# Altium PCB PCB1_IGNIS_v4.PcbDoc (part 2 of 2)
Units mil, origin at the board's own origin, x right, y up, seen from the top; angles counter-clockwise.
Board outline 2952.76 x 1771.65 mil, 4 copper layers (Top Layer, GND, Voltages, Bottom Layer), stack 23.756 mil thick; 108 components, 72 nets, 407 pads, 114 vias.
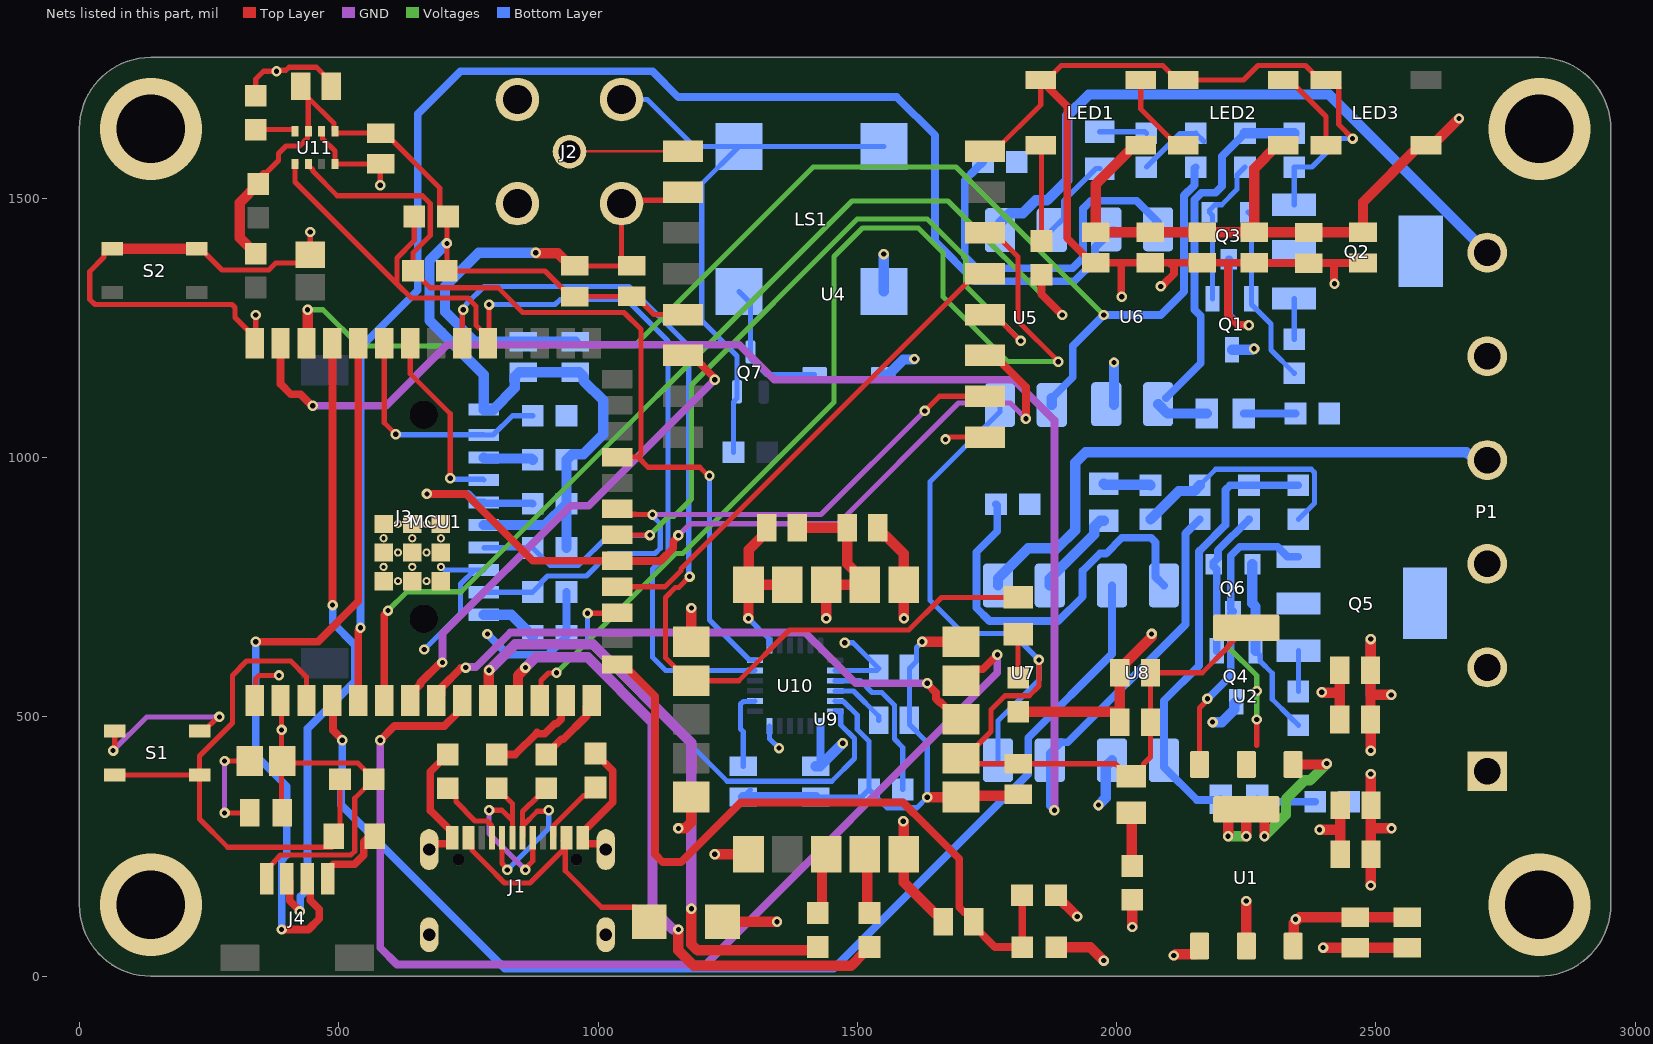
[diagram p4: the nets of this part, all layers, seen from the top]

## Via types
v1: diameter 20, hole 10, Top Layer to Bottom Layer, tented both sides, 110 vias
v2: diameter 196.85, hole 131.89, Top Layer to Bottom Layer, 4 vias

## Nets (pads, with @x,y where several pads share a name; then routed paths per layer and width w, separated by ;. In a path a pad name is that pad's centre, name@x,y a point inside that pad or via, vN(x,y) a via of type N, cw(c..) or ccw(c..) an arc to the next point about the centre after c; other vN are vias at no path point) (continued)
DAT1: J3.P8 R26.2 | length 111.1
  Bottom Layer w20: J3.P8@780,696.85 833.02,696.85 847.16,682.71 R26.2@874.04,655.83
DAT2: J3.P1 R23.2 | length 95.8
  Bottom Layer w20: J3.P1@780,1000 781.81,998.19 871.68,998.19 R23.2@874.04,995.83
DN: J1.A7 J1.B7 R4.2 | length 391
  Top Layer w10: J1.B7@815.2,267.01 815.1,266.91 815.1,217.61 825,207.71 v1(825,205) ; J1.A7@854.57,267.01 855.47,267.91 855.47,290.72 882.84,318.09 903.09,318.09 v1(905,320) ; 854.57,290.72 854.57,317.85 868.98,332.27 869.95,332.27 R4.2@900,362.35
  Bottom Layer w10: v1(825,205) 905,285 v1(905,320)
DP: J1.A6 J1.B6 R3.2 | length 372.7
  Top Layer w10: v1(790,320) 815,320 834.88,300.12 ; R3.2@805,362.35 834.88,332.43 834.88,300.12 ; J1.A6@834.88,267.01 834.88,300.12 ; v1(860,205) 860,207.71 874.25,221.96 J1.B6@874.25,267.01
  GND w10: v1(790,320) 790,275 v1(860,205)
EMATCH_CH1_B: P1.4 Q5.2 Q5.4 U7.1 | length 1139.6
  Bottom Layer w20: U7.1@1771.15,753.51 1771.15,766.7 1829.45,825 1885,825 1920,860 1920,990 1940,1010 2674.47,1010 2678.33,1006.14 2703.7,1006.14 P1.4@2714.57,995.28
EMATCH_CH2_N: P1.6 Q2.2 Q2.4 U5.1 | length 1254.3
  Bottom Layer w20: U5.1@1775,1438.5 1775,1451.69 1794.13,1470.83 1818.92,1470.83 1843.92,1495.83 1865.83,1495.83 1905,1535 1905,1658.77 1946.23,1700 2409.84,1700 P1.6@2714.57,1395.28
GND: C1.2 C2.2 C3.2 C4.2 C5.2 C6.2 C7.2 C8.2 C9.2 C10.2 C11.2 C12.2 C13.1 C14.2 C15.2 C17.1 C19.2 C20.2 C21.2 C22.2 C23.2 C24.2 C25.2 C26.2 C27.1 C28.2 C29.2 C30.2 C31.2 C32.2 C33.2 C34.2 J1.A1_B12 J1.B1_A12 J1.S1 J1.S2 J1.S3 J1.S4 J2.2_1 J2.2_2 J2.2_3 J2.2_4 J3.P6 J4.4 LED1.3 LED2.3 LED3.3 LS1.3 LS1.4 MCU1.41_10 MCU1.41_11 MCU1.41_12 MCU1.41_13 MCU1.41_14 MCU1.41_15 MCU1.41_16 MCU1.41_17 MCU1.41_18 MCU1.41_19 MCU1.41_20 MCU1.41_21 MCU1.GND P1.2 Q2.3 Q3.3 Q5.3 Q6.3 Q7.2 R1.2 R2.2 R5.2 R13.1 R14.2 R15.2 R18.1 R19.2 R20.2 R22.1 R28.1 R30.2 R31.2 R32.2 R35.1 R37.2 R38.2 R39.2 R40.2 S1.3 S1.4 S2.3 S2.4 U1.1 U2.1 U4.1 U4.8 U4.10 U9.1 U9.4 U9.5 U9.6 U9.10 U9.11 U9.15 U9.16 U9.20 U10.1 U10.11 U10.18 U11.1 U11.7 | length 12510.8
  Top Layer w10: S2.4@63.31,1402.32 55.43,1402.32 47.64,1394.53 47.64,1386.65 20,1359.02 20,1305 30.12,1294.88 251.5,1294.88 251.62,1295 294.14,1295 300,1289.14 300,1270.2 337.91,1232.28 MCU1.GND@337.91,1220.47 340,1222.56 v1(340,1275) ; v1(65,435) 65,437.71 68.31,441.01 S1.4@68.31,472.32 ; S2.3@226.69,1402.32 234.57,1402.32 275.18,1361.71 365.05,1361.71 378.69,1375.35 431.3,1375.35 445,1389.06 C13.1@445,1391.5 v1(445,1435) ; S1.3@231.69,472.32 239.57,472.32 267.24,500 v1(270,500) ; v1(280,315) C12.2@328.5,315 C12.2@330.47,315 ; v1(280,415) C11.2@328.5,415 C11.2@330.47,415 ; MCU1.GND@337.91,531.5 340,533.58 340,573.47 346.53,580 v1(385,580) ; R35.1@340,1697.65 340,1730 355,1745 v1(380,1745) 381.91,1746.91 398.23,1746.91 404.09,1752.78 457.29,1752.78 485.99,1724.07 C33.2@485.99,1716.2 ; U11.7@467.06,1629.19 468.95,1627.3 468.95,1614.74 492.65,1591.04 U11.1@492.65,1566.2 C34.2@580.99,1566.2 ; v1(580,1525) 580,1565.21 C34.2@580.99,1566.2 ; C34.2@581.47,1566.67 C34.2@580.99,1566.2 ; C15.2@955,1369.53 1064.53,1369.53 C14.2@1065,1370 1059.09,1370 1045.39,1383.7 J2.2_1@1045.39,1489.61 1051.97,1496.18 1147.99,1496.18 U4.10@1163.66,1511.85 ; v1(1670,1035) 1672.71,1035 1677.12,1039.41 U4.1@1746.34,1039.41 ; U4.8@1746.34,1590.59 1764.06,1590.59 1853.54,1680.08 LED1.3@1853.54,1727.99 1865.35,1727.99 1893.07,1755.71 2089.02,1755.71 2116.73,1727.99 LED2.3@2128.54,1727.99 2244.69,1727.99 2272.4,1755.71 2364.02,1755.71 2391.73,1727.99 LED3.3@2403.54,1727.99 2415.35,1727.99 2428.07,1715.28 2428.07,1641.93 v1(2455,1615) ; U2.1@2159.84,408.31 2159.84,517.14 2175,532.29 v1(2175,535)
  Top Layer w15: J4.4@479.06,188.12 479.06,205.62 489.36,215.93 530.56,215.93 548.33,233.69 548.33,258.8 C10.2@559.53,270 ; J1.S1@674.45,244.17 674.45,246.15 683.89,255.59 714.43,255.59 718.74,259.9 J1.A1_B12@718.74,267.01 718.74,277.64 676.59,319.79 676.59,394.21 R1.2@710,427.62 ; J1.B1_A12@970.71,259.9 975.02,255.59 1005.56,255.59 1015,246.15 J1.S2@1015,244.17 ; J1.B1_A12@970.71,267.01 970.71,277.64 1028.41,335.34 1028.41,395.93 R2.2@995,429.34 ; LED1.3@1853.54,1727.99 1904.61,1676.93 1904.61,1422.99 1952.13,1375.47 C21.2@1960,1375.47 2009.04,1375.47 ; v1(2010,1310) 2009.04,1310.96 2009.04,1375.47 ; v1(2085,1330) 2086.35,1330 2100.01,1343.65 2100.21,1343.65 2110.81,1354.26 2110.81,1366.69 2102.03,1375.47 ; v1(2255,1255) 2254.04,1255.96 2234.04,1255.96 2214.53,1275.47 2214.53,1375.47 ; C26.2@2289.53,1375.24 2369.76,1375.24 C23.2@2370,1375 2419.04,1375 2419.04,1335.96 v1(2420,1335) ; C26.2@2289.53,1375.47 C26.2@2265,1375.47 2214.53,1375.47 ; 2419.04,1375.06 2474.94,1375.06 C22.2@2475,1375.12 ; 2009.04,1375.47 C24.2@2065,1375.47 2102.03,1375.47 ; 2102.03,1375.47 C25.2@2165,1375.47 2214.53,1375.47
  Top Layer w20: S2.4@63.31,1402.32 S2.3@226.69,1402.32 ; v1(880,1395) 880.85,1394.15 922.5,1394.15 947.13,1369.53 C15.2@955,1369.53 ; v1(1155,285) 1168.28,285 1180,296.72 1180,345.24 U9.10@1180.16,345.39 ; v1(1180,710) U9.6@1180,644.76 U9.6@1180.16,644.61 ; v1(1225,235) 1290.24,235 U9.11@1290.39,235.16 ; v1(1290,690) 1290.2,690.2 1290.2,754.65 U9.5@1290.39,754.84 ; C31.2@1325.47,865 1325.47,857.13 1290.39,822.05 U9.5@1290.39,754.84 ; U9.4@1365.2,754.84 U9.5@1290.39,754.84 ; C30.2@1539.53,865 1539.53,857.13 1548.23,848.43 1556.1,848.43 1589.61,814.92 1589.61,754.84 1589.8,754.65 1589.8,690.2 v1(1590,690) ; v1(1588.64,298.96) 1589.61,298 1589.61,180.87 1648.9,121.57 1656.77,121.57 1665.47,112.87 C9.2@1665.47,105 ; v1(1625,645) 1625.2,644.8 1699.65,644.8 U9.20@1699.68,644.76 U9.20@1699.84,644.61 ; v1(1635,345) 1635.2,345.2 1699.65,345.2 1702.38,347.93 1807.46,347.93 C32.2@1810,350.47 ; R32.2@1810,510 1994.17,510 C7.2@2006.3,497.87 ; R5.2@1883.3,56.15 1948.85,56.15 v1(1975,30) ; C7.2@2006.3,490 C7.2@2006.3,497.87 ; v1(2030,95) R31.2@2030,147.35 ; v1(2067.5,660) 2067.5,654.07 2006.3,592.87 C8.2@2006.3,585 C7.2@2006.3,497.87 ; v1(2110,40) 2111.35,40 2113.87,42.52 2151.54,42.52 2159.84,50.83 U1.1@2159.84,58.31 ; v1(2398.04,55.09) 2398.49,54.65 C1.2@2460,54.65 C2.2@2560,54.65 ; v1(2490,175) 2490.18,175.18 2490.18,234.82 C4.2@2490.35,235 2490.18,235.18 2490.18,284.82 ; v1(2490,390) 2490.18,389.82 2490.18,330.18 C3.2@2490.35,330 2490.18,329.82 2490.18,285.18 2490,285 2490.18,284.82 ; v1(2490,435) 2489.76,435.24 2489.76,494.76 C5.2@2489.53,495 2489.53,542.5 ; v1(2490,650) 2489.76,649.76 2489.76,590.24 C6.2@2489.53,590 2489.53,542.5 ; v1(2529.53,542.5) 2489.53,542.5 ; v1(2530,285) 2490.35,285 2490.18,284.82
  GND w10: v1(65,435) 130,500 v1(270,500) ; v1(280,315) v1(280,415)
  GND w20: 2489.53,542.5 2489.53,649.53 v1(2490,650)
  Bottom Layer w10: v1(665,630) 735,700 735,756.18 J3.P6@762.28,783.46 ; MCU1.41_20@696.97,789.37 698.52,789.37 704.43,783.46 J3.P6@762.28,783.46 ; J3.P6@780,783.46 J3.P6@762.28,783.46 ; J2.2_4@1045.39,1690.39 1094.86,1690.39 1185.49,1599.76 LS1.4@1271.75,1599.76 ; R30.2@1261.21,1010 1261.21,1107.35 1268.27,1114.41 Q7.2@1268.27,1127.2 1268.27,1195.79 1200,1264.06 1200,1528.02 LS1.4@1271.75,1599.76 ; C17.1@1280,345.47 C17.1@1293.7,359.17 ; v1(1290,690) 1330.28,649.72 1330.28,638.07 U10.1@1330.79,637.56 ; U10.18@1330.79,482.44 1330.79,457.98 v1(1349.04,439.73) ; C29.2@1420,345.47 1507.82,345.47 R22.1@1522.35,360 1522.35,452.96 1499.8,475.51 1499.8,503.75 1473.59,529.96 1458.07,529.96 U10.11@1457.56,530.47 ; R22.1@1522.38,360 1557.38,325 1615,325 v1(1635,345) 1635,450.91 1600.35,485.55 C27.1@1600.35,493.43 C28.2@1600.35,593.43 1614.06,607.13 1614.06,634.06 v1(1625,645) ; LS1.3@1551.28,1599.76 LS1.4@1271.75,1599.76 ; R15.2@2057.35,1559.99 2088.29,1590.93 ; 2088.27,1590.95 2122.3,1624.97 2152.02,1624.97 R14.2@2152.35,1625.3 ; R14.2@2152.35,1625.3 R14.2@2168.26,1609.36 ; R19.2@2160.34,946.48 2191.25,977.39 2375.39,977.39 2381.25,971.53 2381.25,912.08 R18.1@2350.34,881.17 ; Q2.3@2342.35,1487.65 R13.1@2342.35,1559.99 2376.74,1559.99 2431.75,1615 v1(2455,1615)
  Bottom Layer w15: v1(2175,535) 2175.58,535 2220.18,579.6 2220.18,699.26 Q6.3@2224.4,703.48 2220.18,707.7 2220.18,810.42 2237.69,827.94 2310.2,827.94 2329.34,808.8 Q5.3@2350.34,808.8 ; Q3.3@2216.41,1382.33 2216.41,1274.95 2235.4,1255.96 2254.04,1255.96 v1(2255,1255)
  Bottom Layer w20: v1(880,1395) 770,1395 705,1330 705,1281.11 762.41,1223.7 C20.2@855.96,1223.7 856.2,1223.46 955.72,1223.46 C19.2@955.96,1223.23 ; C17.1@1280,345.47 C29.2@1420,345.47 ; R20.2@2065.34,881.17 2119.68,935.51 2149.43,935.51 R19.2@2160.34,946.45
  other v2: 137.8,137.8 2814.96,137.8 137.8,1633.86 2814.96,1633.86
GPS_UART_RX: MCU1.11 R34.2 | length 1240.4
  Top Layer w20: MCU1.11@837.91,531.5 845.63,539.21 845.63,579.28 860,593.65 v1(860,595) ; v1(1155,90) 1155,50 1184.61,20.39 1487.83,20.39 1512.83,45.39 R34.2@1523.77,56.3
  GND w20: v1(860,595) 880,615 980,615 1105,490 1105,129.64 1144.64,90 v1(1155,90)
GPS_UART_TX: MCU1.10 R33.2 | length 1188.4
  Top Layer w20: MCU1.10@787.91,531.5 789.04,532.63 789.04,589.04 v1(790,590) ; v1(1180,130) 1180,61.72 1191.72,50 1417.12,50 R33.2@1423.61,56.48
  GND w20: v1(790,590) 840,640 990.36,640 1180,450.36 v1(1180,130)
INT_GPS: MCU1.8 U9.18 | length 1151.9
  Top Layer w15: MCU1.8@687.91,531.5 698.13,541.71 698.13,556.63 735.54,594.04 744.04,594.04 v1(745,595) ; v1(1635,565) 1635,563.65 1651.75,546.9 1651.75,535.26 1659.22,527.79 1661.15,527.79 1693.94,495 U9.18@1699.84,495
  GND w15: v1(745,595) 745.96,595.96 764.14,595.96 830.68,662.5 1399.51,662.5 1497.01,565 v1(1635,565)
MPU6050_INT: MCU1.17 U10.12 | length 868.9
  Top Layer w10: v1(980,700) 1036.14,700 MCU1.17@1037.13,700.98
  Bottom Layer w10: v1(980,700) 980,645.11 1249.28,375.83 1450.72,375.83 1494.43,419.54 1494.43,458.34 1468.11,484.66 1468.11,510.28 1467.6,510.79 U10.12@1457.56,510.79
NetC17_2: C17.2 U10.20 | length 152
  Bottom Layer w10: C17.2@1280,404.53 1280,471.61 1275,476.61 1275,524.61 1280.35,529.96 1301.93,529.96 U10.20@1302.44,530.47
NetC27_2: C27.2 U10.10 | length 111.9
  Bottom Layer w10: U10.10@1457.56,550.16 1492.44,550.16 1541.3,501.3 C27.2@1541.3,493.43
NetD2_A: D2.A U5.2 | length 161
  Bottom Layer w10: U5.2@1875,1438.5 1897.72,1461.23 1897.72,1494.48 1960.46,1557.21 D2.A@1967.35,1557.21
NetD2_C: D2.C R15.1 | length 91.2
  Bottom Layer w10: D2.C@1967.35,1628.08 2054.57,1628.08 R15.1@2057.35,1625.3
NetD3_A: D3.A U7.2 | length 172
  Bottom Layer w20: U7.2@1871.15,753.51 1871.15,766.7 1956.8,852.35 1956.8,866.71 1968.45,878.36 D3.A@1975.34,878.36
NetD3_C: D3.C R20.1 | length 91.2
  Bottom Layer w20: D3.C@1975.34,949.23 1976.73,947.84 2063.95,947.84 R20.1@2065.34,946.45
NetD4_C: D4.C R31.1 | length 103
  Top Layer w20: D4.C@2028.31,314.92 2029.15,314.07 2029.15,213.5 R31.1@2030,212.65
NetD5_A: D5.A LS1.2 Q7.3 | length 275.2
  Bottom Layer w10: LS1.2@1271.75,1320.24 1293.86,1298.13 Q7.3@1293.86,1203.58 1293.86,1190.79 1324.65,1160 D5.A@1417.72,1160
NetD6_C: D6.C R32.1 | length 84.3
  Top Layer w10: R32.1@1810,575.31 D6.C@1810,659.57
NetD7_A: D7.A R11.1 R13.2 U6.3 | length 796.1
  Bottom Layer w15: U6.3@2095,1114.69 2162.06,1181.75 2162.06,1272.87 2150,1284.93 2150,1496.99 2163.5,1510.5 2190.5,1510.5 2203.26,1523.25 2203.26,1581.18 R11.1@2247.35,1625.3
  Bottom Layer w20: U6.3@2080,1102.99 2097.99,1085 D7.A@2174.13,1085 ; R11.1@2247.35,1625.3 R13.2@2342.35,1625.3
NetD7_C: D7.C R37.1 | length 99.7
  Bottom Layer w15: D7.C@2245,1085 R37.1@2344.69,1085
NetD8_A: D8.A R16.1 R18.2 U8.3 | length 863.5
  Bottom Layer w15: D8.A@2200.34,341.24 2199.1,340 2154.46,340 2091.15,403.31 U8.3@2091.15,416.5 2091.15,531.24 2158.74,598.83 2158.74,818.89 2166.07,826.22 2210,870.15 2210,937.66 2218.79,946.45 R16.1@2255.34,946.45 R18.2@2350.34,946.45
NetD8_C: D8.C R39.1 | length 113.6
  Bottom Layer w15: D8.C@2271.21,341.24 2276.21,336.24 R39.1@2382.69,336.24
NetJ1_A5: J1.A5 R1.1 | length 144.1
  Top Layer w10: R1.1@710,362.35 725.91,346.44 725.91,336.61 763.07,299.45 785.87,299.45 794.61,290.72 794.61,267.91 J1.A5@795.51,267.01
NetJ1_B5: J1.B5 R2.1 | length 135
  Top Layer w10: J1.B5@913.62,267.01 914.53,267.91 914.53,290.72 971.93,348.12 979.09,348.12 R2.1@995,364.03
NetJ2_1: J2.1 U4.9 | length 218.9
  Top Layer w4.58: J2.1@945.3,1590.3 U4.9@1163.37,1590.3
  Top Layer w20: J2.1@945,1590 J2.1@945.3,1590.3 ; U4.9@1163.37,1590.3 U4.9@1163.66,1590.59
NetLED1_2: LED1.2 LED2.4 | length 166.9
  Top Layer w10: LED1.2@2046.46,1727.99 2046.46,1672.28 2116.73,1602.01 LED2.4@2128.54,1602.01
NetLED1_4: LED1.4 R29.2 | length 184.4
  Top Layer w10: R29.2@1855,1417.65 LED1.4@1855,1602.01
NetLED2_2: LED2.2 LED3.4 | length 166.9
  Top Layer w10: LED2.2@2321.46,1727.99 2333.27,1727.99 2403.54,1657.72 LED3.4@2403.54,1602.01
NetQ1_1: Q1.1 Q3.1 R11.2 | length 288.3
  Bottom Layer w10: Q3.1@2179,1472.88 2184.95,1466.93 Q1.1@2184.95,1306.05 ; Q3.1@2179,1476.82 2189.75,1487.57 2202.57,1487.57 2232.2,1517.2 2232.2,1544.84 R11.2@2247.35,1559.99
NetQ1_2: Q1.2 Q3.2 R12.1 | length 346.9
  Bottom Layer w10: Q3.2@2253.81,1472.88 2259.75,1466.94 Q1.2@2259.75,1306.05 2259.75,1295.22 2297.49,1257.48 2297.49,1207.54 R12.1@2342.35,1162.68
NetQ2_1: Q2.1 R12.2 | length 78.7
  Bottom Layer w10: R12.2@2342.35,1227.95 Q2.1@2342.35,1306.65
NetQ4_1: Q4.1 Q6.1 R16.2 | length 280.8
  Bottom Layer w15: Q6.1@2186.99,794.03 2186.99,790.09 2192.94,784.14 Q4.1@2192.94,627.2 ; Q6.1@2186.99,797.97 2195.24,806.22 2195.24,821.01 R16.2@2255.34,881.14
NetQ4_2: Q4.2 Q6.2 R17.1 | length 346.9
  Bottom Layer w10: Q4.2@2267.74,627.2 2276.52,618.42 2276.52,607.59 2300,584.11 2300,534.14 R17.1@2334.4,499.74 ; R17.1@2334.43,499.74 R17.1@2350.34,483.8
  Bottom Layer w20: Q6.2@2261.8,794.03 2261.8,718.92 2267.74,712.98 Q4.2@2267.74,627.2
NetQ5_1: Q5.1 R17.2 | length 78.7
  Bottom Layer w10: R17.2@2350.34,549.1 Q5.1@2350.34,627.8
NetR22_2: R22.2 U10.9 | length 302.8
  Bottom Layer w10: U10.9@1457.56,569.84 1505.46,569.84 1528.31,546.99 1547.15,546.99 1571.65,522.49 1571.65,457.2 1587.65,441.2 R22.2@1587.65,360
NetR33_1: R33.1 U9.13 | length 120.2
  Top Layer w20: R33.1@1423.77,121.63 1431.88,129.75 1431.88,227.04 U9.13@1440,235.16
NetR34_1: R34.1 U9.14 | length 117.2
  Top Layer w20: U9.14@1514.8,235.16 1519.28,230.68 1519.28,126.11 R34.1@1523.77,121.63
NetR38_1: R38.1 U6.2 | length 719
  Bottom Layer w15: R38.1@1728.91,1556.56 1707.26,1534.91 1707.26,1387.74 1730,1365 1915,1365 1935,1385 1935,1480 1950,1495 2038.19,1495 2080,1453.19 U6.2@2080,1440 ; R38.1@1728.91,1556.59 R38.1@1742.35,1570
NetR40_1: R40.1 U8.2 | length 762.4
  Bottom Layer w15: R40.1@1767.35,910 1770,907.35 1770,858.02 1729.52,817.54 1729.52,710.27 1754.79,685 1887.51,685 1934.42,731.91 1934.42,781.65 1967.65,814.88 1979.73,814.88 2010.13,845.28 2066.21,845.28 2075,836.49 2075,769.66 U8.2@2091.15,753.51
PPS_GPS: D6.A MCU1.32 U9.7 | length 1959.2
  Top Layer w10: MCU1.32@737.91,1220.47 738.16,1220.72 738.16,1283.16 v1(740,1285) ; v1(1176.6,770.57) 1155.62,749.58 1149.07,749.58 1130,730.5 1130,614.06 1174.25,569.8 1180.16,569.8 1271.33,569.8 1369.03,667.5 1599.32,667.5 1662.25,730.43 D6.A@1810,730.43
  Bottom Layer w10: v1(740,1285) 740,1289.06 746.95,1296 746.95,1296.95 780,1330 1060,1330 1175,1215 1175,772.17 v1(1176.6,770.57)
PYRO_CH1_CONT: MCU1.39 R19.1 U7.3 | length 3140.9
  Top Layer w15: MCU1.39@387.91,1220.47 387.91,1142.09 407.83,1122.17 426.48,1122.17 448.65,1100 v1(450,1100)
  GND w15: v1(450,1100) 591.47,1100 708.97,1217.5 1272.5,1217.5 1340,1150 1801.82,1150 1880,1071.82 v1(1880,320)
  Bottom Layer w15: v1(1880,320) 1871.15,328.85 U7.3@1871.15,416.5 1871.15,429.37 1892.78,451 1905.65,451 2132.78,678.13 2132.78,853.55 R19.1@2160.34,881.14
PYRO_CH1_GATE: MCU1.4 U8.1 | length 2251.4
  Top Layer w15: MCU1.4@487.91,531.5 489.04,530.37 489.04,474.35 507.04,456.35 v1(507.04,455)
  Bottom Layer w15: v1(507.04,455) 507.04,393.3 504.54,390.8 504.54,330.46 820,15 1454.52,15 1829.52,390 1829.52,459.73 1991.15,621.37 U8.1@1991.15,753.51
PYRO_CH2_CONT: MCU1.38 R14.1 U5.3 | length 2528.2
  Top Layer w20: MCU1.38@437.91,1220.47 440,1222.56 v1(440,1285)
  Voltages w10: v1(440,1285) 470,1285 540,1215 1070,1215 1415,1560 1690,1560 v1(1975,1275)
  Bottom Layer w15: U5.3@1875,1114.69 1915.18,1154.86 1915.18,1215.18 v1(1975,1275) 2085,1275 2130,1320 2130,1505.28 2150.06,1525.34 2150.06,1557.71 R14.1@2152.35,1559.99
  Bottom Layer w20: U5.3@1875,1101.5 U5.3@1875,1114.69
PYRO_CH2_GATE: MCU1.5 U6.1 | length 2898.4
  Top Layer w15: MCU1.5@537.91,531.5 537.91,666.35 541.99,670.42 v1(541.99,671.77)
  Bottom Layer w15: v1(541.99,671.77) 541.79,671.97 541.79,1211.79 652.5,1322.5 652.5,1662.5 735,1745 1105,1745 1155,1695 1576.21,1695 1650,1621.21 1650,1416.72 1726.72,1340 1918.28,1340 1958.37,1380.08 1958.37,1405.18 1991.69,1438.5 U6.1@1995,1438.5
RESET: C10.1 MCU1.3 R7.2 S1.1 S1.2 | length 1094.1
  Top Layer w10: S1.2@68.31,387.68 S1.1@231.69,387.68 ; MCU1.3@437.91,531.5 437.91,577.09 407.5,607.5 322.5,607.5 295,580 295,488.02 231.69,424.72 S1.1@231.69,387.68 ; R7.2@502.35,380 502.35,271.87 500.47,270 500.47,262.48 486.77,248.78 286.22,248.78 231.69,303.31 S1.1@231.69,387.68
RESET_GPS: MCU1.9 U9.19 | length 2160.7
  Top Layer w15: v1(580,455) 607.46,482.46 703.8,482.46 727.7,506.36 727.7,521.28 MCU1.9@737.91,531.5 ; U9.19@1699.84,569.8 1721.87,591.83 1741.83,591.83 v1(1770,620)
  GND w15: v1(580,455) 580,55 612.5,22.5 1207.5,22.5 1770,585 v1(1770,620)
RFM95W_CS: MCU1.18 U4.5 | length 961.5
  Top Layer w10: MCU1.18@1037.13,750.98 1129.27,750.98 1160,781.72 1160,785.75 1728.62,1354.37 U4.5@1746.34,1354.37
RFM95W_INT: MCU1.7 U4.14 | length 966.9
  Top Layer w15: MCU1.7@637.91,531.5 637.91,543.31 657.7,563.09 657.7,566.2 695.54,604.04 699.04,604.04 v1(700,605) ; U4.14@1163.66,1196.89 1181.38,1196.89 1224.04,1154.22 1224.04,1150.96 v1(1225,1150)
  GND w15: v1(700,605) 700,660 947.02,907.02 982.02,907.02 v1(1225,1150)
RFM95W_RESET: MCU1.12 U4.6 | length 2036.4
  Top Layer w10: MCU1.12@887.91,531.5 890.17,533.75 890.17,570.17 904.82,584.82 919.82,584.82 v1(920,585) ; U4.6@1746.34,1433.11 1764.06,1433.11 1810,1387.17 1810,1262.98 1887.38,1185.61 v1(1887.38,1184.71)
  Voltages w10: v1(920,585) 1150,815 1163.28,815 1455,1106.72 1455,1387.5 1510,1442.5 1617.5,1442.5 1665,1395 1665,1310 1790,1185 1887.09,1185 v1(1887.38,1184.71)
RXD0: J4.3 MCU1.36 | length 1478.3
  Top Layer w15: v1(340,645) 460,645 537.91,722.91 MCU1.36@537.91,1220.47 ; v1(390,90) 441.82,90 462.5,110.68 462.5,129.32 445.19,146.63 445.19,182.62 J4.3@439.69,188.12
  Bottom Layer w15: v1@340,643.65 340,426.38 400,366.38 400,233.86 390,223.86 v1(390,90)
SD_CS: J3.P2 MCU1.34 | length 358.8
  Top Layer w10: MCU1.34@637.91,1220.47 637.91,1161.74 715,1084.65 v1(715,960)
  Bottom Layer w10: v1(715,960) 716.65,958.35 778.35,958.35 J3.P2@780,956.69
SD_DETECT: J3.WP MCU1.35 R28.2 | length 464.9
  Top Layer w10: MCU1.35@587.91,1220.47 587.91,1067.09 v1(610,1045)
  Bottom Layer w10: v1(610,1045) 610.85,1044.15 779.15,1044.15 J3.WP@780,1043.31 797.72,1043.31 835.24,1080.83 R28.2@874.04,1080.83
SDO: R35.2 U11.5 | length 77.9
  Top Layer w10: R35.2@340,1632.35 413.98,1632.35 415.87,1630.46 U11.5@415.87,1629.19
SNS_I2C_SCL: MCU1.31 R10.2 U10.23 U11.4 | length 1986.8
  Top Layer w10: U11.4@417.76,1568.09 U11.4@415.87,1566.2 415.87,1531.42 612.35,1334.95 ; R10.2@645.63,1465 645.6,1418.31 612.35,1385.05 612.35,1334.95 ; MCU1.31@787.91,1220.47 MCU1.31@787.91,1232.28 ; v1(790,1295) 790,1234.37 MCU1.31@787.91,1232.28 ; 612.35,1334.95 639.8,1307.5 749.32,1307.5 765,1291.82 765,1255.2 MCU1.31@787.91,1232.28
  Bottom Layer w10: v1(790,1295) 917.03,1295 927.03,1305 1055,1305 1135,1225 1135,843.28 1135,815 1105,785 1105,615 1130.47,589.53 U10.23@1302.44,589.53
SNS_I2C_SDA: MCU1.23 R21.2 U10.24 U11.3 | length 1739.1
  Top Layer w10: U11.3@441.47,1566.2 441.47,1563.25 450.17,1554.55 450.17,1552.22 497.38,1505 661.62,1505 676.57,1490.05 676.57,1428.06 643.29,1394.78 R21.2@643.29,1360 675.82,1327.5 807.5,1327.5 855,1280 1050,1280 1082.71,1247.29 1082.71,1006.84 1076.85,1000.98 ; MCU1.23@1037.13,1000.98 1076.85,1000.98 ; v1(1215,965) 1212.54,965 1196.09,981.45 1096.39,981.45 1076.85,1000.98
  Bottom Layer w10: v1(1215,965) 1215,686.61 1291.89,609.72 1301.93,609.72 U10.24@1302.44,609.21
SNS_SPI_MISO: J3.P7 MCU1.21 R24.2 U4.2 | length 1255.6
  Top Layer w10: MCU1.21@1037.13,900.98 1047.34,890.77 1071.73,890.77 1072.5,890 v1(1105,890) ; v1(1630,1090) 1658.15,1118.15 U4.2@1746.34,1118.15
  GND w10: v1(1105,890) 1430,890 v1(1630,1090)
  Bottom Layer w10: J3.P7@780,740.16 780.33,740.49 R24.2@873.71,740.49 ; R24.2@874.07,740.83 889.98,756.73 889.98,759.14 902.57,771.73 977.61,771.73 1020.87,815 1110,815 1120,825 1120,849.5 1120,872.29 1105,887.29 v1(1105,890)
SNS_SPI_MOSI: J3.P3 MCU1.19 R27.2 U4.3 | length 1734.9
  Top Layer w15: v1(670,930) 745,930 874.02,800.98 MCU1.19@1037.13,800.98 1037.62,800.49 1120.49,800.49 1145,825 1145,838.65 1155,848.65 v1(1155,850) ; U4.3@1746.34,1196.89 1764.06,1196.89 1825,1135.94 v1(1825,1075)
  GND w10: v1(1155,850) 1177.5,872.5 1462.5,872.5 1695,1105 1795,1105 v1(1825,1075)
  Bottom Layer w15: v1(670,930) 749.19,930 757.97,921.21 757.97,917.7 762.28,913.39 J3.P3@780,913.39 781.28,912.11 872.76,912.11 R27.2@874.04,910.83
SNS_SPI_SCK: J3.P5 MCU1.20 R25.2 U4.4 | length 1736.9
  Top Layer w10: MCU1.20@1037.63,850.5 v1(1100,850.5) ; U4.4@1746.34,1275.63 1764.06,1275.63 1814.69,1225 v1(1815,1225)
  Top Layer w15: MCU1.20@1037.13,850.98 MCU1.20@1037.62,850.49
  Voltages w10: v1(1100,850.5) 1135.73,886.21 1146.21,886.21 1180,920 1180,1140 1500,1460 1635,1460 1709.04,1385.96 1709.04,1330.96 v1(1815,1225)
  Bottom Layer w10: J3.P5@780,826.77 780.45,826.31 873.55,826.31 R25.2@874.04,825.83 889.98,809.92 907.46,792.43 962.43,792.43 1020,850 1099.5,850 v1(1100,850.5)
TXD0: J4.2 MCU1.37 | length 1231
  Top Layer w15: J4.2@400.31,188.12 405.81,182.62 405.81,145.54 425,126.35 v1(425,125) ; MCU1.37@487.91,1220.47 488.14,1220.25 488.14,715.7 v1(488.36,715.47)
  Bottom Layer w15: v1(425,125) 425.96,125.96 425.96,153.46 440,167.5 440,477.36 531.48,568.84 531.48,638.25 488.36,681.36 v1(488.36,715.47)
USB2_N: MCU1.13 R3.1 | length 206
  Top Layer w15: R3.1@805,427.65 840.48,427.65 882.55,469.73 884.87,467.41 897.3,467.41 916.64,486.75 920.41,486.75 929.2,495.54 929.2,509.47 941.23,521.5 947.91,521.5 MCU1.13@937.91,531.5
USB2_P: MCU1.14 R4.1 | length 142.5
  Top Layer w15: R4.1@900,427.65 929.07,456.75 932.84,456.75 977.91,501.83 977.91,521.5 MCU1.14@987.91,531.5
VBAT: C1.1 C2.1 P1.1 P1.3 P1.5 Q1.3 Q4.3 R6.2 U1.3 U6.4 U8.4 | length 616.1
  Top Layer w20: R6.2@1883,156.15 v1(1924.04,115.13) ; U1.3@2340.16,58.31 2341.39,59.54 2341.39,101.98 2353.11,113.7 C2.1@2560,113.7
  Bottom Layer w20: v1(1965,330) 1979.18,344.18 1979.18,404.53 U8.4@1991.15,416.5 ; U6.4@1995,1101.5 v1(1994.98,1183.24) ; v1(2185,490) 2202.37,490 2226.56,514.19 2226.56,525.02 Q4.3@2230.34,528.8 ; Q1.3@2222.35,1207.65 2261.29,1207.65 2263.65,1210 v1(2265,1210)
  other v1: 2345,110
VBAT_MON: C9.1 MCU1.15 R5.1 R6.1 | length 1444.5
  Top Layer w15: MCU1.15@1037.13,600.98 1048.94,600.98 1110,539.92 1110,235 1125,220 1160,220 1275,335 1587.96,335 1631.63,291.33 1696.67,226.29 1696.67,132.86 1705.46,124.07 1713.33,124.07 1724.53,112.87 1724.53,97.13 1765.5,56.15 R5.1@1818,56.15 1817.84,56.3 1817.84,156 R6.1@1817.69,156.15
VBUS: D1.2 J1.A4_B9 J1.B4_A9 | length 532
  Top Layer w10: J1.A4_B9@750.24,267.01 757.05,260.2 757.05,242.95 785,215 820,180 869.1,180 932.4,243.3 ; J1.B4_A9@932.4,260.2 J1.B4_A9@939.21,267.01 936.69,264.49 936.69,260.2 936.69,243.3 936.69,203.31 1006.93,133.07 1070.98,133.07 D1.2@1099.06,105
VCC_3V3: C7.1 C8.1 C11.1 C12.1 C14.1 C15.1 C19.1 C20.1 C21.1 C22.1 C23.1 C24.1 C25.1 C26.1 C28.1 C29.1 C30.1 C31.1 C32.1 C33.1 C34.1 D4.A J3.CD J3.P4 J4.1 LED1.1 LED2.1 LED3.1 MCU1.2 R7.1 R8.1 R10.1 R21.1 R23.1 R24.1 R25.1 R26.1 R27.1 R36.1 U2.2 U4.13 U5.4 U7.4 U9.2 U9.3 U9.17 U10.8 U10.13 U11.6 U11.8 | length 7706.3
  Top Layer w10: R36.1@360.91,1543.56 360.91,1549.78 383.98,1572.86 383.98,1586.4 398.63,1601.04 425.07,1601.04 434.58,1610.55 434.58,1610.77 439.58,1615.77 439.58,1627.91 U11.6@440.86,1629.19 ; J4.1@360.94,188.12 360.94,205.62 376.1,220.78 376.1,221.55 387.98,233.43 523.32,233.43 530.83,240.94 530.83,343.2 567.62,380 536.71,410.91 393.62,410.91 C11.1@389.53,415 ; MCU1.2@387.91,531.5 390,529.41 v1(390,475) 390,415.47 C11.1@389.53,415 ; C12.1@389.53,315 C11.1@389.53,415 ; C33.1@426.94,1716.2 426.94,1708.33 C33.1@441.47,1693.8 ; U11.6@441.47,1629.19 C33.1@441.47,1693.8 ; U11.8@492.65,1627.62 494.54,1625.73 C34.1@581.47,1625.73 589.34,1625.73 695,1520.07 695,1476.24 708.59,1462.65 v1@708.59,1411.33 ; U11.8@492.65,1629.19 490.76,1631.08 490.76,1644.51 C33.1@441.47,1693.8 ; v1(708.59,1413.05) v1@708.59,1411.33 ; U4.13@1163.66,1275.63 1108.19,1275.63 1073.35,1310.47 C15.1@955,1310.47 947.13,1310.47 897.6,1360 R21.1@708.59,1360 v1@708.59,1411.33 ; U9.17@1699.84,420.2 1705.75,420.2 1757.61,472.06 1757.61,513.6 1784.95,540.94 1831.62,540.94 1850,559.32 v1(1850,610) ; U9.17@1702.8,417.24 1710.51,409.53 C32.1@1810,409.53 1997.68,409.53 2021.42,385.79 D4.A@2028.31,385.79 2035.2,385.79 2051.85,402.44 2051.85,409.33 2065.35,422.83 C7.1@2065.35,490 C8.1@2065.35,585 2165,585 2215,635 2215,636.69 U2.2@2250,671.69 ; 2270,445 v1(2270,495)
  Top Layer w20: R8.1@340,1392.68 309.09,1423.59 309.09,1491.71 R36.1@345,1527.62 ; R36.1@345,1527.65 355.91,1538.56 R36.1@355.91,1544.18 ; C31.1@1384.53,865 C30.1@1480.47,865 1480.47,795.08 1514.8,760.75 1514.8,754.84 1440,754.84 v1(1440,690) ; LED1.1@2046.46,1602.01 2034.65,1602.01 1960,1527.36 C21.1@1960,1434.53 C24.1@2065,1434.53 C25.1@2165,1434.53 C26.1@2265,1434.53 ; LED2.1@2321.46,1602.01 2309.65,1602.01 2265,1557.36 C26.1@2265,1434.53 ; v1(2660,1653.74) 2608.27,1602.01 LED3.1@2596.46,1602.01 2584.65,1602.01 2475,1492.36 C22.1@2475,1434.17 2474.94,1434.11 2370.06,1434.11 C23.1@2370,1434.06 2369.76,1434.29 2265.24,1434.29 C26.1@2265,1434.53
  Voltages w10: 2215,635 2270,580 v1(2270,495)
  Bottom Layer w10: U10.8@1457.56,589.53 C28.1@1537.4,589.53 ; v1(1475.92,642.81) 1491.91,642.81 C28.1@1541.3,593.43 ; U7.4@1771.15,416.5 1771.15,492.4 1850,571.25 v1(1850,610) 1799.35,660.65 1704.35,660.65 1640,725 1640,953.31 1775,1088.31 U5.4@1775,1101.5
  Bottom Layer w15: v1(786.67,659.84) 826.51,620 846.81,620 846.89,619.92 901.19,619.92 901.27,620 903.52,620 R26.1@939.35,655.83 R24.1@939.35,740.83 ; C29.1@1429.21,413.23 U10.13@1429.21,482.44
  Bottom Layer w20: v1(708.59,1413.05) 675,1379.46 675,1265 780,1160 J3.CD@780,1092.52 797.72,1092.52 839.39,1134.19 839.39,1155.94 848.09,1164.65 C20.1@855.96,1164.65 856.2,1164.41 939.35,1164.41 955.72,1164.41 C19.1@955.96,1164.17 963.83,1164.17 972.53,1155.47 972.53,1147.6 1010,1110.13 1010,1045 971.73,1006.73 950.25,1006.73 R23.1@939.35,995.83 R27.1@939.35,910.83 R25.1@939.35,825.83 ; J3.P4@780,870.08 898.57,870.08 R27.1@939.35,910.83 ; C29.1@1420,404.53 1427.44,404.53 v1(1471.93,449.02)
  other v1: 2270,550
VCC_5V: C3.1 C4.1 C5.1 C6.1 D1.1 D5.C LS1.1 U1.2 U2.3 | length 1103.7
  Top Layer w20: D1.1@1240,105 v1(1345,105) ; v1(2215,270) 2215,305.91 2230.79,321.69 U1.2@2250,321.69 ; U1.2@2250,58.31 v1(2250,145) ; v1(2250,270) 2250,320 2270.91,320 2285,305.91 v1(2285,270) ; U2.3@2340.16,408.31 2348.41,408.31 2348.46,408.25 2401.9,408.25 2403.65,410 v1(2405,410) ; v1(2391.3,282.5) 2431.3,282.5 ; v1(2395.47,547.5) 2396.43,546.54 2425.08,546.54 2429.12,542.5 2430.47,542.5 ; C5.1@2430.47,495 2430.47,542.5 ; C6.1@2430.47,590 2430.47,542.5 ; C4.1@2431.3,235 2431.3,282.5 ; C3.1@2431.3,330 2431.3,282.5
  Voltages w20: v1(2215,270) v1(2250,270) ; v1(2285,270) 2326.51,311.51 2326.51,341.51 2362.88,377.88 2372.88,377.88 v1(2405,410)
  Bottom Layer w20: D5.C@1550,1160 1559.45,1160 1588.49,1189.04 1609.04,1189.04 v1(1610,1190) ; v1(1551.12,1392.33) 1551.28,1392.17 LS1.1@1551.28,1320.24
WS2812B_DATA: MCU1.6 R29.1 | length 1988.7
  Top Layer w15: MCU1.6@587.91,531.5 587.91,696.56 595,703.65 v1(595,705) ; R29.1@1855,1352.35 1855,1315 v1(1895,1275)
  Voltages w10: v1(595,705) 631.44,741.44 736.44,741.44 1490,1495 1675,1495 v1(1895,1275)
pads on no net: J1. J1.A8 J1.B8 J3. J3.G1 J3.G2 J4.5 J4.6 LED3.2 MCU1.16 MCU1.24 MCU1.25 MCU1.26 MCU1.28 MCU1.29 MCU1.30 MCU1.33 U4.7 U4.11 U4.12 U4.15 U4.16 U9.8 U9.9 U9.12 U10.2 U10.3 U10.4 U10.5 U10.6 U10.7 U10.14 U10.15 U10.16 U10.17 U10.19 U10.21 U10.22
copper on no net: | length 15.3
  Bottom Layer w15: 2049.52,739.37 2049.52,754.66

## Polygon pours and split planes (outlines as drawn)
GND on Bottom Layer "GND_L04_P064" (solid, pour order 64): 141.36,0 cw(c141.36,137.8) 3.57,137.8 3.57,1633.86 cw(c141.36,1633.86) 141.36,1771.65 2818.53,1771.65 cw(c2818.53,1633.86) 2956.32,1633.86 2956.32,137.8 cw(c2818.53,137.8) 2818.53,0
EMATCH_CH2_N on Bottom Layer "EMATCH_CH2_N_L04_P059" (solid, pour order 59): 2285,1415 2300,1430 2515,1430 2530,1445 2530,1475 2545,1490 2750,1490 2765,1475 2765,1325 2750,1310 2545,1310 2530,1325 2530,1355 2515,1370 2300,1370 2285,1385
EMATCH_CH1_B on Bottom Layer "EMATCH_CH1_B_L04_P060" (solid, pour order 60): 2305,680 2290,695 2290,745 2305,760 2530,760 2545,775 2545,1050 2560,1065 2560,1070 2825,1070 2840,1055 2840,920 2825,905 2690,905 2675,890 2675,645 2660,630 2540,630 2520,650 2520,665 2505,680
GND on Bottom Layer "GND_L04_P042" (solid, pour order 42): 560,910 725,910 725,735 560,735
GND on Bottom Layer "GND_L04_P055" (solid, pour order 55): 2465,1445 2485,1460 2485,1515 2465,1530 2295,1530 2280,1515 2280,1460 2295,1445
GND on Bottom Layer "GND_L04_P054" (solid, pour order 54): 2285,785 2300,770 2470,770 2490,785 2490,840 2470,855 2300,855 2285,840
VCC_3V3 on Top Layer "VCC_3V3_L01_P058" (solid, pour order 58): 2205,605 2220,590 2220,385 2235,370 2270,370 2285,385 2285,590 2300,605 2330,605 2340,615 2340,695 2325,710 2180,710 2165,695 2165,620 2180,605
GND on Top Layer "GND_L01_P063" (solid, remove dead copper, pour order 63): 137.8,0 cw(c137.8,137.8) 0,137.8 0,1633.86 cw(c137.8,1633.86) 137.8,1771.65 2814.96,1771.65 cw(c2814.96,1633.86) 2952.76,1633.86 2952.76,137.8 cw(c2814.96,137.8) 2814.96,0
GND on Top Layer "GND_L01_P062" (solid, pour order 62): 560,910 725,910 725,735 560,735
VCC_5V on Top Layer "VCC_5V_L01_P050" (solid, pour order 50): 2165,350 2180,365 2325,365 2340,350 2340,255 2330,245 2180,245 2165,260
VCC_3V3 on Voltages "VCC_3V3_L03_P056" (solid, pour order 56): 137.8,0 cw(c137.8,137.8) 0,137.8 0,1633.86 cw(c137.8,1633.86) 137.8,1771.65 2814.96,1771.65 cw(c2814.96,1633.86) 2952.76,1633.86 2952.76,137.8 cw(c2814.96,137.8) 2814.96,0
VBAT on Voltages "VBAT_L03_P048" (solid, pour order 48): 1850,130 1850,265 1945,360 1945,465 1975,495 2165,495 2180,510 2180,565 2195,580 2270,580 2285,565 2285,395 2270,380 2075,380 2055,360 1935,240 1935,165 1970,130 1970,10
VCC_5V on Voltages "VCC_5V_L03_P044" (solid, pour order 44): 1625,850 1625,775 1605,755 1605,50 1585,30 1210,30 1190,50 1190,135 1210,155 1478.86,155 1500,176.14 1500,850
VBAT on Voltages "VBAT_L03_P047" (solid, pour order 47): 2300,120 2325,145 2385,145 2505,145 2645,285 2645,440 2665,460 2775,460 2790,445 2790,270 2600,80 2440,80 2420,60 2365,5 2085,5 2065,5 1975,5 1935,45 1855,125 1850,130 1850,180 1860,190 1910,190 1920,180 2015,85 2105,85 2120,70 2120,50 2135,35 2285,35 2300,50
VBAT on Voltages "VBAT_L03_P049" (solid, pour order 49): 2735,1245 2765,1215 2765,1155 2595,1155 2585,1165 2065,1165 2045,1145 2045,1055 2030,1040 1955,1040 1940,1055 1940,1215 1970,1245
VCC_5V on Voltages "VCC_5V_L03_P052" (solid, pour order 52): 2390,630 2245,775 1530,775 1525,780 1500,805 1500,1410 1522.5,1432.5 1580,1432.5 1605,1410 1605,870 1625,850 2265,850 2460,655 2460,585 2450,575 2400,575 2390,585
VCC_5V on Voltages "VCC_5V_L03_P051" (solid, pour order 51): 2273.33,40 2290,52.5 2290,140 2305,155 2445,155 2460,170 2460,630 2445,645 2405,645 2390,630 2390,465 2380,455 2315,455 2305,445 2305,375 2295,365 2180,365 2165,350 2165,55 2180,40
VBAT on Voltages "VBAT_L03_P046" (solid, pour order 46): 2560,1260 2590,1290 2835,1290 2865,1260 2870,335 2835,300 2590,300 2555,335 2555,475 2585,505.55 2760,505 2780,535 2780,665 2760,695 2580,695 2555,720 2555,860 2580,895 2760,895 2780,925 2780,1070 2754.5,1095.5 2579.5,1095.5 2560,1115 2560,1230
GND on GND "GND_L02_P057" (solid, pour order 57): 137.8,0 cw(c137.8,137.8) 0,137.8 0,1633.86 cw(c137.8,1633.86) 137.8,1771.65 2814.96,1771.65 cw(c2814.96,1633.86) 2952.76,1633.86 2952.76,137.8 cw(c2814.96,137.8) 2814.96,0
GND on GND "GND_L02_P043" (solid, pour order 43): 560,910 725,910 725,735 560,735

## Silkscreen, mask and mechanical layers (free items; w line width, h text height)
Top Overlay:
  drawing of 67 lines, arcs and shapes, not listed
  text "Boot" at 60,1460 h50
  text "[CH2+  CH2-]" at 2930,1140 h30 r90
  text "[CH1+  CH1-]" at 2930,744.99 h30 r90
  text "IGNIS v4" at 2032.5,715.36 h60
  text "Put that back!" at 397,603 h45 r90
  text "[VBAT+  VBAT-]" at 2930,280 h30 r90
  text "Reset" at 35,275 h50
Bottom Overlay:
  drawing of 23 lines, arcs and shapes, not listed
  text "J. A. Prieto     E. Guadarrama" at 208.83,1261.88 h70.87 r90
Mechanical 1:
  the board outline again, w0

## Text inside footprints (layer, text, board x,y; h text height)
J1: Top 3D Body "PCB EDGE" at 1049.45,5.2 h24
MCU1: Top 3D Body "ANTENNA" at 170.98,698.82 h50 r90